# EAGLE board RM_finish (EAGLE 9.5.2)
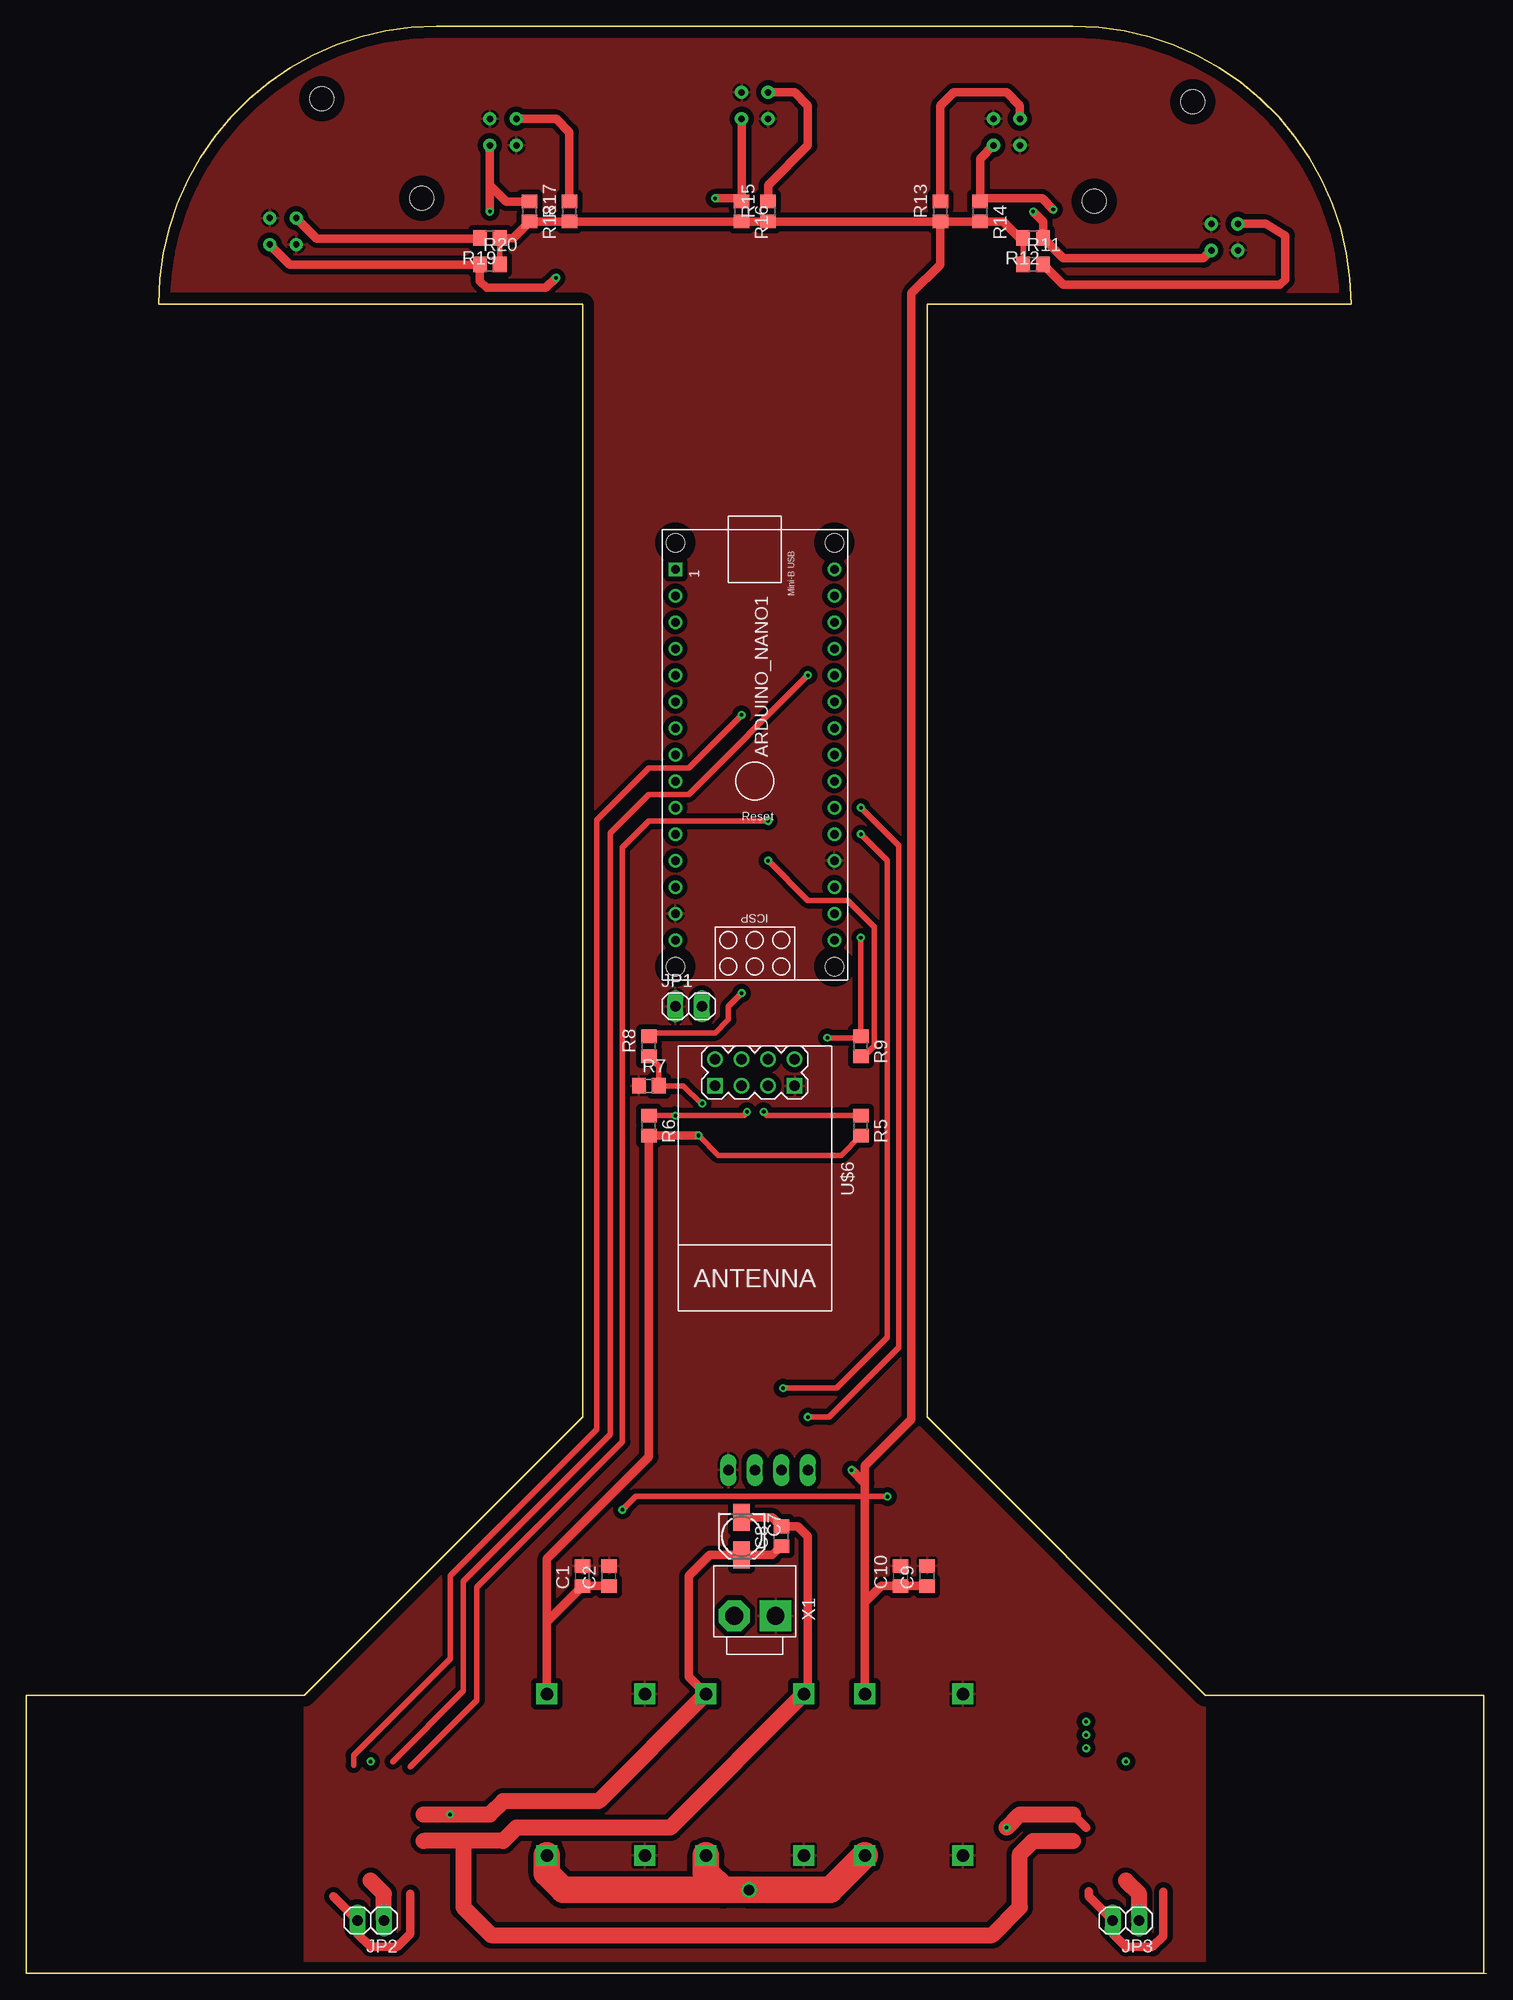
[diagram p0: board, top side]
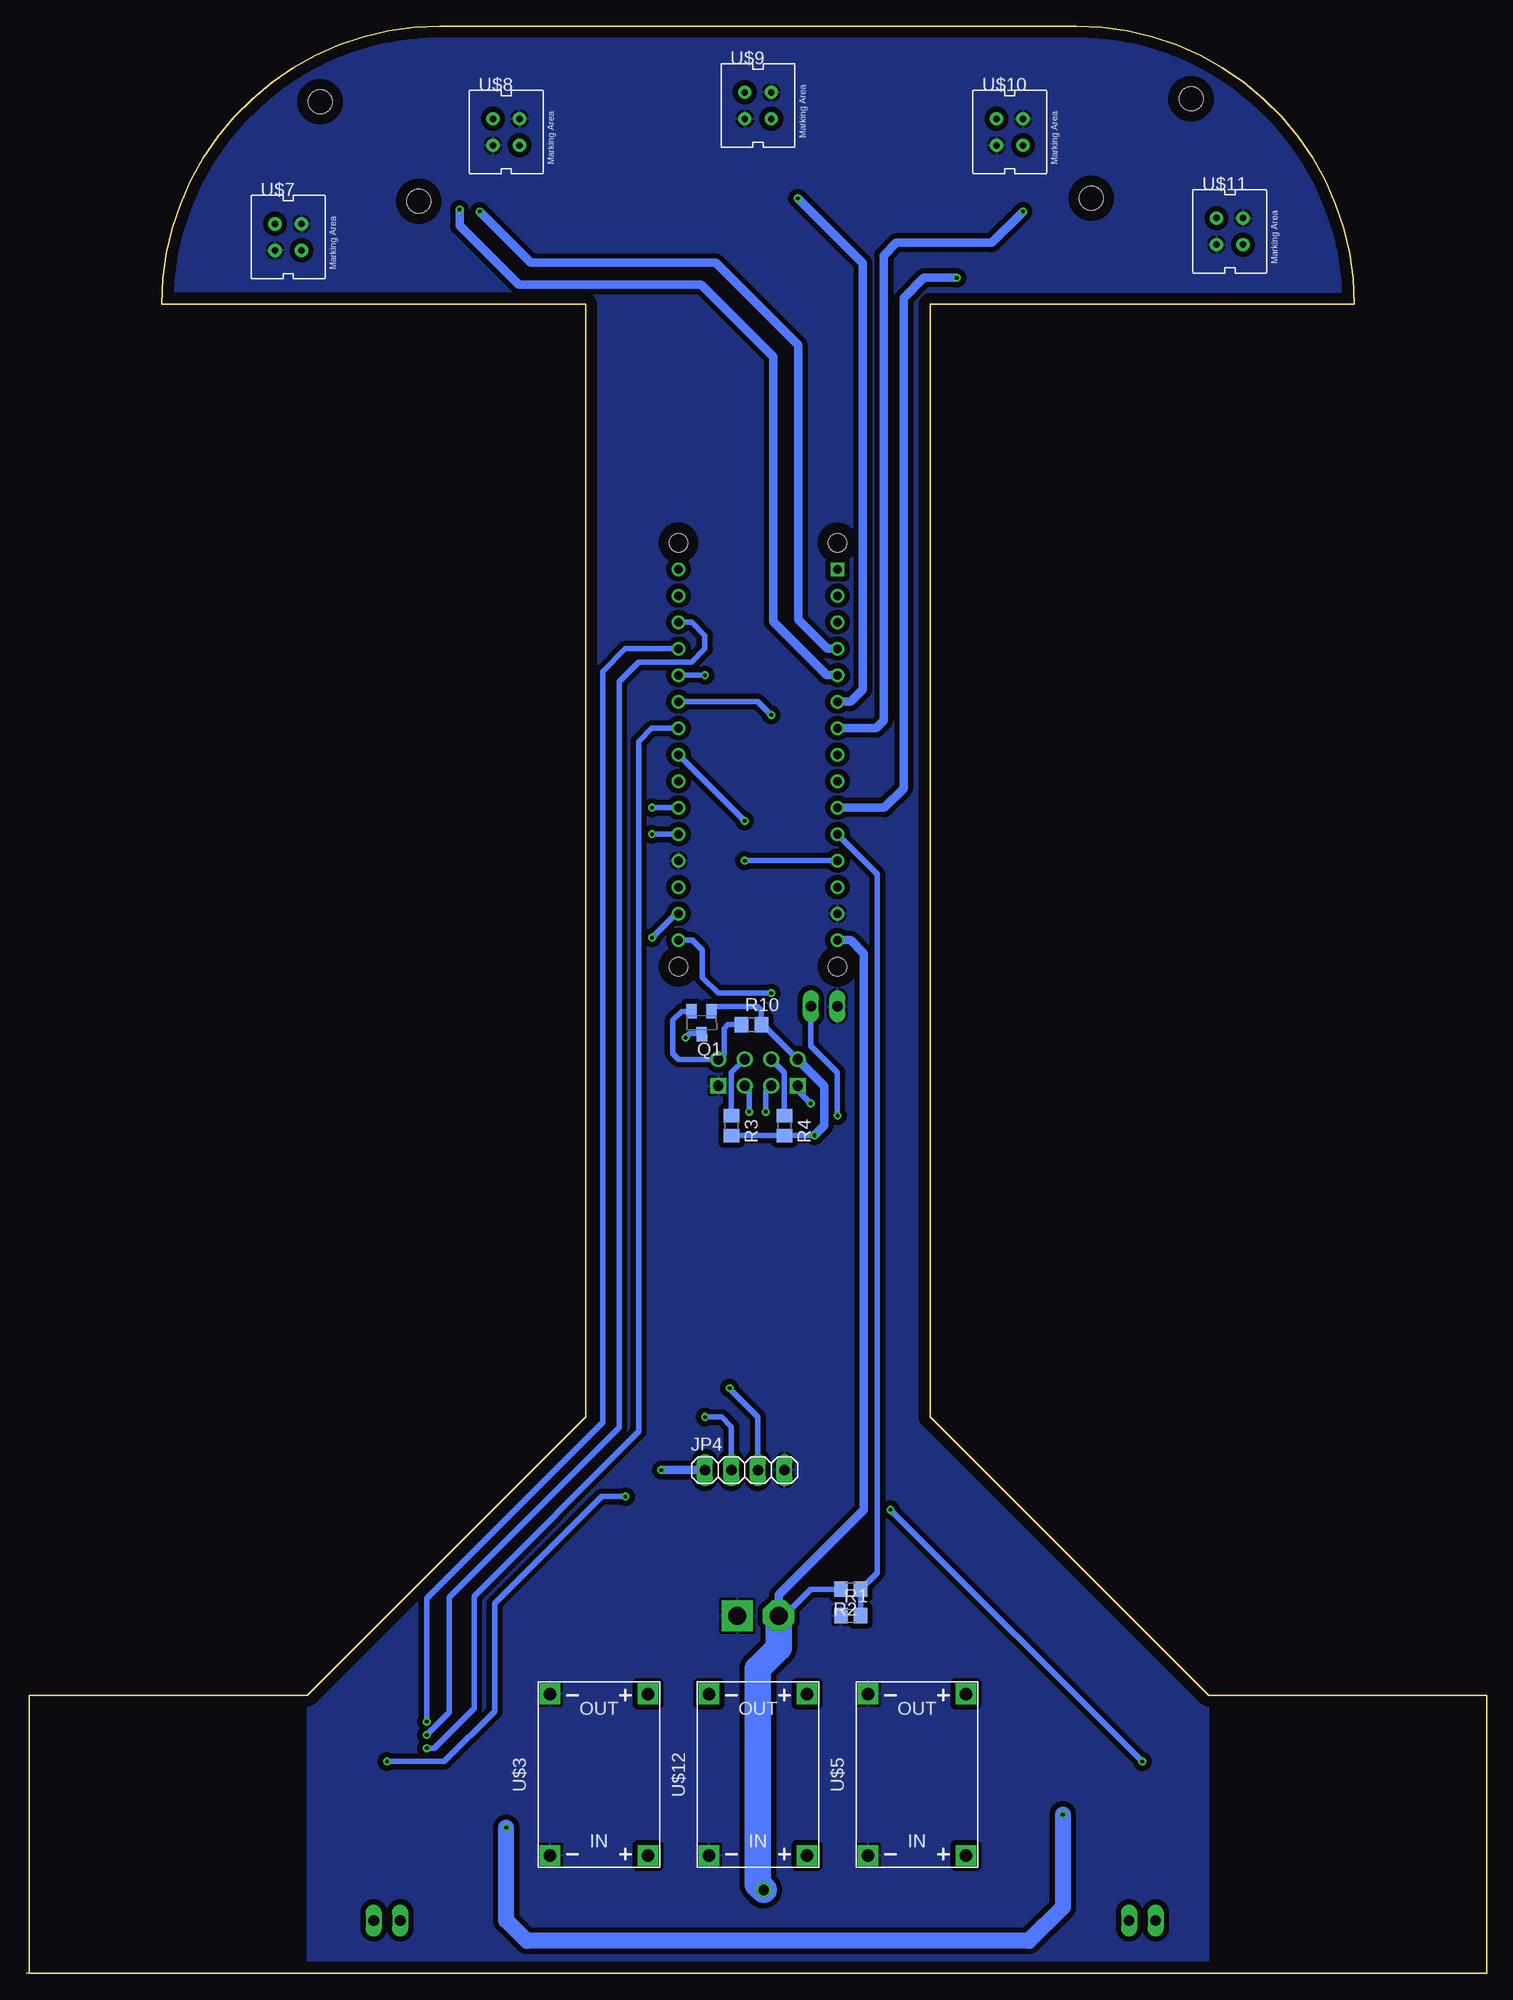
[diagram p1: board, bottom side, seen from below]

Size 140 x 186.69 mm. Coordinates in mm from the lower left corner, seen from the top.
Outline: 139.7,0 140,0
Outline: 139.7,0 0,0 0,26.67 26.67,26.67 53.34,53.34 53.34,160.02 12.7,160.02 arc-90 39.37,186.69 100.33,186.69 arc-90 127,160.02 86.36,160.02 86.36,53.34 113.03,26.67 139.7,26.67 139.7,0
Copper layers (1*16): Top 0.035mm / dielectric 1.5mm / Bottom 0.035mm
Design rules "default *": minimum track width 6mil, minimum drill 0.35mm, track to track 20mil, track to pad 20mil, pad to pad 20mil, via to via 20mil, smd to smd 10mil, copper to edge 40mil, drill to drill 6mil, minimum pad ring 10mil, minimum via ring 8mil, stop-mask expansion 4mil, vias tented up to drill 0mil, thermal gap 10mil
Holes 2.3 mm at 37.92,170.19 28.34,179.73 111.82,179.44 102.37,169.89

## Footprints (pad centres in the part's own frame; a part is rotated, then mirrored left to right if it is on the bottom)
ARDUINO_NANO = drill 0.8 square: 1 -20.32,-7.62 | drill 0.8: 2 -17.78,-7.62; 3 -15.24,-7.62; 4 -12.7,-7.62; 5 -10.16,-7.62; 6 -7.62,-7.62; 7 -5.08,-7.62; 8 -2.54,-7.62; 9 0,-7.62; 10 2.54,-7.62; 11 5.08,-7.62; 12 7.62,-7.62; 13 10.16,-7.62; 14 12.7,-7.62; 15 15.24,-7.62; 16 15.24,7.62; 17 12.7,7.62; 18 10.16,7.62; 19 7.62,7.62; 20 5.08,7.62; 21 2.54,7.62; 22 0,7.62; 23 -2.54,7.62; 24 -5.08,7.62; 25 -7.62,7.62; 26 -10.16,7.62; 27 -12.7,7.62; 28 -15.24,7.62; 29 -17.78,7.62; 30 -20.32,7.62 | hole 1.778: -22.86,-7.62; -22.86,7.62; 17.78,7.62; 17.78,-7.62
C0805 = smd 1.3 x 1.5: 1 -0.95,0; 2 0.95,0
153CLV-0405 = smd 2.6 x 1.6: + 1.8,0; - -1.8,0
1X02 = drill 1.016 long: 1 -1.27,0; 2 1.27,0
1X04 = drill 1.016 long: 1 -3.81,0; 2 -1.27,0; 3 1.27,0; 4 3.81,0
SOT23 = smd 1 x 1.4: 1 -0.95,-1.1; 2 0.95,-1.1; 3 0,1.1
R0805 = smd 1.3 x 1.5: 1 -0.95,0; 2 0.95,0
DC-DC-STEP-DOWN-MP2307 = drill 1.2 pad 2 square: IN+ -7.747,-4.699; IN- -7.747,4.699; OUT+ 7.747,-4.699; OUT- 7.747,4.699
WIRELESS-WIFI-ESP-01 = drill 1 square: A1 -8.89,3.81; D1 -8.89,-3.81 | drill 1: A2 -11.43,3.81; B1 -8.89,1.27; B2 -11.43,1.27; C1 -8.89,-1.27; C2 -11.43,-1.27; D2 -11.43,-3.81
4 = drill 0.61 pad 1.27: A -1.27,1.27; C 1.27,-1.27; E 1.27,1.27; K -1.27,-1.27
B2P-VH = drill 1.7 pad 3 square: 1 -1.98,0 | drill 1.7 pad 3 octagon: 2 1.98,0

## Placement (x,y rotation side)
ARDUINO_NANO1  [ARDUINO_NANO]  69.85,114.3 270 top
C1  100n  [C0805]  53.34,38.1 90 top
C2  1u  [C0805]  55.88,38.1 90 top
C7  22u  [153CLV-0405]  68.58,41.91 270 top
C8  100n  [C0805]  72.39,41.91 90 top
C9  100n  [C0805]  86.36,38.1 90 top
C10  10u  [C0805]  83.82,38.1 90 top
JP1  [1X02]  63.5,92.71 0 top
JP2  [1X02]  33.02,5.08 180 top
JP3  [1X02]  105.41,5.08 180 top
JP4  [1X04]  71.12,48.26 0 bottom
Q1  BSS123  [SOT23]  75.25,91.14 180.6 bottom
R1  1k  [R0805]  60.96,34.29 0 bottom
R2  2k2  [R0805]  60.96,36.83 180 bottom
R3  10k  [R0805]  72.39,81.28 270 bottom
R4  10k  [R0805]  67.31,81.28 270 bottom
R5  10k  [R0805]  80.01,81.28 270 top
R6  10k  [R0805]  59.69,81.28 270 top
R7  20k  [R0805]  59.69,85.09 0 top
R8  10k  [R0805]  59.69,88.9 90 top
R9  10k  [R0805]  80.01,88.9 270 top
R10  10k  [R0805]  70.47,90.96 0 bottom
R11  200  [R0805]  96.52,163.83 0 top
R12  20k  [R0805]  96.52,166.37 180 top
R13  200  [R0805]  87.63,168.91 90 top
R14  20k  [R0805]  91.44,168.91 270 top
R15  200  [R0805]  71.12,168.91 90 top
R16  20k  [R0805]  68.58,168.91 270 top
R17  200  [R0805]  52.07,168.91 90 top
R18  20k  [R0805]  48.26,168.91 270 top
R19  200  [R0805]  44.45,166.37 180 top
R20  20k  [R0805]  44.45,163.83 0 top
U$3  DC-DC-STEP-DOWN-MP2307  [DC-DC-STEP-DOWN-MP2307]  85.09,19.05 90 bottom
U$5  DC-DC-STEP-DOWN-MP2307  [DC-DC-STEP-DOWN-MP2307]  54.61,19.05 90 bottom
U$6  WIRELESS-WIFI-ESP-01  [WIRELESS-WIFI-ESP-01]  69.85,76.2 270 top
U$7  CNY70  [4]  114.87,166.46 0 bottom
U$8  CNY70  [4]  93.98,176.53 0 bottom
U$9  CNY70  [4]  69.85,179.07 0 bottom
U$10  CNY70  [4]  45.72,176.53 0 bottom
U$11  CNY70  [4]  24.63,167.01 0 bottom
U$12  DC-DC-STEP-DOWN-MP2307  [DC-DC-STEP-DOWN-MP2307]  69.85,19.05 90 bottom
X1  B2P-VH-B  [B2P-VH]  69.85,34.29 180 top

## Library data of the parts
ARDUINO_NANO1 = ArduinoNanoV30
C1 C2 C7-C10 = rcl; SPICEPREFIX: C
JP1-JP4 = pinhead
Q1 = transistor-small-signal
R1-R20 = rcl; SPICEPREFIX: R
U$3 U$5 U$12 = diy-modules (1)
U$6 = diy-modules
U$7-U$11 = cny70
X1 = con-JST VH

## Nets
3.3V: C1.1 C2.1 Q1.1 R3.2 R4.2 R5.2 R6.2 R10.2 U$5.OUT+ U$6.D2
5.0V: C9.1 C10.1 JP4.1 R11.1 R12.2 R13.1 R14.2 R15.1 R16.2 R17.1 R18.2 R19.1 R20.2 U$3.OUT+
C5.0V: ARDUINO_NANO1.12 R9.2
CH_PD: R3.1 U$6.B2
ECHO: ARDUINO_NANO1.20 JP4.3
GND: ARDUINO_NANO1.14 ARDUINO_NANO1.19 C1.2 C2.2 C9.2 C10.2 JP1.1 JP4.4 R1.1 R7.1 U$3.IN- U$3.OUT- U$5.IN- U$5.OUT- U$6.A1 U$7.E U$7.K U$8.E U$8.K U$9.E U$9.K U$10.E U$10.K U$11.E U$11.K U$12.IN- X1.1
GPIO0: JP1.2 R6.1 U$6.C1
GPIO2: R5.1 U$6.B1
IN1L: ARDUINO_NANO1.25
IN1P: ARDUINO_NANO1.27
IN2L: ARDUINO_NANO1.26
IN2P: ARDUINO_NANO1.28
MGND: C7.- C8.2 U$12.OUT-
MOTL1: JP2.2
MOTL2: JP2.1
MOTP1: JP3.2
MOTP2: JP3.1
N$2: R11.2 U$7.A
N$3: R13.2 U$8.A
N$4: R15.2 U$9.A
N$5: R17.2 U$10.A
N$6: R19.2 U$11.A
PWML: ARDUINO_NANO1.23
PWMP: ARDUINO_NANO1.24
RST: R4.1 U$6.C2
RX: ARDUINO_NANO1.17 Q1.3 R9.1
SUPPLY_V: ARDUINO_NANO1.11 R1.2 R2.1
TRIG: ARDUINO_NANO1.21 JP4.2
TX: ARDUINO_NANO1.16 R8.2
UC1: ARDUINO_NANO1.4 R12.1 U$7.C
UC2: ARDUINO_NANO1.5 R14.1 U$8.C
UC3: ARDUINO_NANO1.6 R16.1 U$9.C
UC4: ARDUINO_NANO1.7 R18.1 U$10.C
UC5: ARDUINO_NANO1.10 R20.1 U$11.C
URXD: R7.2 R8.1 U$6.D1
UTXD: Q1.2 R10.1 U$6.A2
V+: ARDUINO_NANO1.15 R2.2 U$3.IN+ U$5.IN+ U$12.IN+ X1.2
VS: C7.+ C8.1 U$12.OUT+

## Tracks (layer width: path | path; a pad name or v marks a point on that pad's centre or on a via)
3.3V  (via drill 0.35)
  Top 0.508: v64.45,80.33 66.35,78.43 78.11,78.43 R5.2
  Top 0.813: v64.45,80.33 R6.2 59.69,49.53 49.91,39.75 49.91,33.72 | U$5.OUT+ 49.91,33.72 | 49.91,33.72 C1.1 C2.1
  Bottom 0.508: v64.45,80.33 R4.2 R3.2 | U$6.D2 69.37,90.96 R10.2 69.52,92.32 69.9,92.7 73.86,92.7 Q1.1
  Bottom 0.813: U$6.D2 63.5,85.09 63.5,81.28 v64.45,80.33
5.0V  (via drill 0.35)
  Top 0.508: v57.15,44.45 58.42,45.72 80.39,45.72 v82.55,45.72 | R19.1 R20.2 | R12.2 R11.1
  Top 0.813: U$3.OUT+ 80.39,35.56 | 80.39,35.56 80.39,45.72 80.39,46.99 | 80.39,46.99 80.39,48.64 84.86,53.11 84.86,161.06 87.63,163.83 R13.1 | 80.39,35.56 81.98,37.15 C10.1 C9.1 | 80.39,46.99 v79.12,48.26 | R13.1 R15.1 R16.2 R17.1 R18.2 46.67,166.37 R19.1 | R12.2 95.25,166.37 93.66,167.96 R14.2 R13.1
  Bottom 0.508: v57.15,44.45 v33.02,20.32 | v105.41,20.32 99.9,20.32 95.09,25.13 95.09,35.46 84.83,45.72 v82.55,45.72
  Bottom 0.813: v79.12,48.26 JP4.1
C5.0V  (via drill 0.35)
  Top 0.254: 80.33,87.95 R9.2
  Top 0.508: v71.12,106.68 74.93,102.87 78.74,102.87 81.28,100.33 81.28,88.9 80.33,87.95
  Bottom 0.508: v71.12,106.68 ARDUINO_NANO1.12
CH_PD
  Bottom 0.508: R3.1 72.39,86.36 U$6.B2
ECHO  (via drill 0.35)
  Top 0.508: v80.01,109.22 82.55,106.68 82.55,60.96 77.7,56.11 v72.56,56.11
  Bottom 0.508: JP4.3 69.85,53.35 72.56,56.06 v72.56,56.11 | v80.01,109.22 ARDUINO_NANO1.20
GND
  pour Bottom: 113.03,0 26.67,0 26.67,26.67 53.34,53.34 53.34,160.02 12.7,160.02 arc-90 39.37,186.69 100.33,186.69 arc-90 127,160.02 86.36,160.02 86.36,53.34 113.03,26.67
  pour Top: 26.67,26.67 26.67,0 113.03,0 113.03,26.67 86.36,53.34 86.36,160.02 127,160.02 arc90 100.33,186.69 39.37,186.69 arc90 12.7,160.02 53.34,160.02 53.34,53.34
GPIO0  (via drill 0.35)
  Top 0.508: R6.1 v62.23,82.23 68.83,82.23 69.1,82.5 v69.1,82.6
  Bottom 0.508: v62.23,82.23 62.23,86.36 64.77,88.9 JP1.2 | v69.1,82.6 69.1,84.57 U$6.C1
GPIO2  (via drill 0.35)
  Top 0.508: v70.7,82.6 70.7,82.5 70.97,82.23 R5.1
  Bottom 0.508: v70.7,82.6 70.7,84.67 U$6.B1
IN1L  (via drill 0.35)
  Top 0.508: v68.58,120.65 63.5,115.57 59.69,115.57 54.71,110.59 54.71,52.17 40.64,38.1 40.64,30.17 31.4,20.93 31.4,19.97
  Bottom 0.508: v68.58,120.65 69.85,121.92 ARDUINO_NANO1.25
IN1P  (via drill 0.35)
  Bottom 0.508: v101.6,24.13 101.6,35.96 84.72,52.84 84.72,124.83 82.55,127 ARDUINO_NANO1.27
IN2L  (via drill 0.35)
  Top 0.508: v74.93,124.46 63.5,113.03 59.69,113.03 55.98,109.32 55.98,51.67 41.91,37.6 41.91,27.07 35.14,20.3
  Bottom 0.508: v74.93,124.46 ARDUINO_NANO1.26
IN2P  (via drill 0.35)
  Bottom 0.508: v101.6,22.86 99.43,25.03 99.43,36.06 83.15,52.34 83.15,123.86 81.28,125.73 76.2,125.73 74.93,127 74.93,128.27 76.2,129.54 ARDUINO_NANO1.28
MGND
  Top 0.813: U$12.OUT- 74.93,27.18 74.93,41.91 73.98,42.86 C8.2 71.54,43.71 C7.-
  Top 1.524: U$12.OUT- 61.72,13.97 46.99,13.97 45.72,12.7 41.91,12.7 | 41.91,12.7 38.1,12.7 | 100.33,12.7 96.52,12.7 95.25,11.43 95.25,6.35 92.58,3.68 44.58,3.68 41.91,6.35 41.91,12.7
MOTL1
  Top 0.813: 29.45,7.38 JP2.2 31.75,3.81 33.02,2.54 35.56,2.54 36.83,3.81 36.83,7.62
MOTL2
  Top 0.305: 32.7,9.21 33.02,8.89 33.35,9.22
  Top 1.524: 33.02,8.89 34.29,7.62 JP2.1
MOTP1
  Top 0.813: 101.84,7.86 101.84,7.38 JP3.2 104.14,3.81 105.41,2.54 107.95,2.54 108.99,3.58 108.99,7.85
MOTP2
  Top 0.305: 105.09,9.21 105.41,8.89 105.74,9.22
  Top 1.524: 105.41,8.89 106.68,7.62 JP3.1
N$2
  Top 0.813: U$7.A 118.81,167.73 120.7,166.6 120.7,162.4 120.17,161.88 99.42,161.88 R11.2
N$3
  Top 0.813: R13.2 87.63,179.07 88.9,180.34 93.98,180.34 95.25,179.07 U$8.A
N$4
  Top 0.813: U$9.A 73.66,180.34 74.93,179.07 74.93,175.26 71.12,171.45 R15.2
N$5
  Top 0.813: U$10.A 50.8,177.8 52.07,176.53 R17.2
N$6
  Top 0.813: R19.2 43.45,166.32 27.86,166.32 U$11.A
PWML  (via drill 0.35)
  Top 0.508: v71.12,110.49 59.69,110.49 57.15,107.95 57.15,50.97 43.18,37 43.18,26.22 43.2,26.2 36.8,19.8
  Bottom 0.508: v71.12,110.49 ARDUINO_NANO1.23
PWMP  (via drill 0.35)
  Bottom 0.508: v101.6,21.59 100.9,21.59 97.06,25.43 97.06,36.16 81.28,51.94 81.28,118.11 80.01,119.38 ARDUINO_NANO1.24
RST
  Bottom 0.508: R4.1 67.31,86.36 U$6.C2
RX  (via drill 0.35)
  Top 0.508: v76.8,89.7 79.86,89.7 R9.1 v80.01,99.29 v80,99.3
  Bottom 0.508: Q1.3 75.3,90.1 76.4,90.1 v76.8,89.7 | v80,99.3 77.7,101.6 ARDUINO_NANO1.17
SUPPLY_V
  Bottom 0.508: R1.2 R2.1 58.42,38.42 58.42,105.41 ARDUINO_NANO1.11
TRIG  (via drill 0.35)
  Top 0.508: v80.01,111.76 83.66,108.11 83.66,60.03 76.97,53.34 v74.93,53.34
  Bottom 0.508: v74.93,53.34 73.34,53.34 72.39,52.39 JP4.2 | v80.01,111.76 ARDUINO_NANO1.21
TX  (via drill 0.35)
  Top 0.254: R8.2 60.01,90.17
  Top 0.508: 60.01,90.17 66.04,90.17 67.31,91.44 67.31,92.71 v68.58,93.98
  Bottom 0.508: v68.58,93.98 73.68,93.98 75.2,95.5 75.2,98.1 76.16,99.06 ARDUINO_NANO1.16
UC1  (via drill 0.35)
  Top 0.813: v96.52,168.91 97.47,167.96 R12.1 99.42,164.42 112.83,164.42 U$7.C
  Bottom 0.813: v96.52,168.91 91.61,164 73.9,164 66,156.1 66,129.8 63.2,127 ARDUINO_NANO1.4
UC2  (via drill 0.35)
  Top 0.254: R14.1 91.76,170.18
  Top 0.813: U$8.C 91.44,173.99 R14.1 | 91.76,170.18 97.38,170.18 v98.45,169.11
  Bottom 0.508: 61.9,124.46 ARDUINO_NANO1.5
  Bottom 0.813: v98.45,169.11 98.45,167.55 92.8,161.9 75.3,161.9 68.4,155 68.4,129.6 63.26,124.46 61.9,124.46
UC3  (via drill 0.35)
  Top 0.254: R16.1 68.26,170.18
  Top 0.813: U$9.C R16.1 | 68.26,170.18 v66.04,170.18
  Bottom 0.813: v66.04,170.18 59.8,163.94 59.8,123.1 60.98,121.92 ARDUINO_NANO1.6
UC4  (via drill 0.35)
  Top 0.813: U$10.C 44.45,171.45 | 44.45,171.45 46.04,169.86 R18.1 | 44.45,171.45 v44.45,168.91
  Bottom 0.813: v44.45,168.91 47.46,165.9 56.6,165.9 57.8,164.7 57.8,120.1 58.52,119.38 ARDUINO_NANO1.7
UC5  (via drill 0.35)
  Top 0.813: U$11.C 25.27,163.83 R20.1 43.5,162.24 44.15,161.59 49.83,161.59 v50.8,162.56
  Bottom 0.813: v50.8,162.56 53.94,162.56 55.9,160.6 55.9,113.6 57.74,111.76 ARDUINO_NANO1.10
URXD  (via drill 0.35)
  Top 0.508: R8.1 60.64,87 R7.2 63.01,85.09 64.7,83.4 v64.8,83.4
  Bottom 0.508: v64.8,83.4 66.04,84.64 U$6.D1
UTXD
  Bottom 0.508: R10.1 72.74,90.96 73.1,90.6 73.1,88.19 U$6.A2 77.43,87.63 78,88.2 78,91.4 77.17,92.23 Q1.2
V+  (via drill 1)
  Top 2.54: 66.8,8 v69.3,8 77.09,8 U$3.IN+ | U$12.IN+ 65.15,9.65 66.8,8 | 66.8,8 51.5,8 49.91,9.59 U$5.IN+
  Bottom 0.254: X1.2 67.31,34.29
  Bottom 0.508: 67.31,34.29 64.77,36.83 R2.2
  Bottom 0.813: ARDUINO_NANO1.15 60.96,99.06 59.69,97.79 59.69,44.45 67.87,36.27 X1.2
  Bottom 2.54: X1.2 67.87,31.19 69.85,29.21 69.85,8.55 v69.3,8
VS  (via drill 0.35)
  Top 0.813: U$12.OUT+ 63.5,28.45 63.5,38.1 65.51,40.11 C7.+ 71.54,40.11 C8.1 | 100.33,15.24 101.6,13.97
  Top 1.524: U$12.OUT+ 54.86,16.51 45.72,16.51 44.45,15.24 v40.64,15.24 38.1,15.24 | v93.98,13.97 95.25,15.24 100.33,15.24
  Bottom 1.524: v40.64,15.24 40.64,6.35 43.88,3.11 92.01,3.11 93.98,5.08 v93.98,13.97